# Altium PCB ControlBoard_v2.PcbDoc (part 1 of 2)
Units mm, origin at the board's own origin, x right, y up, seen from the top; angles counter-clockwise.
Board outline 155.45 x 113.03 mm, 2 copper layers (Top Layer, Bottom Layer); 127 components, 106 nets, 627 pads, 129 vias.
Unrouted connection lines stored in the file: 132.
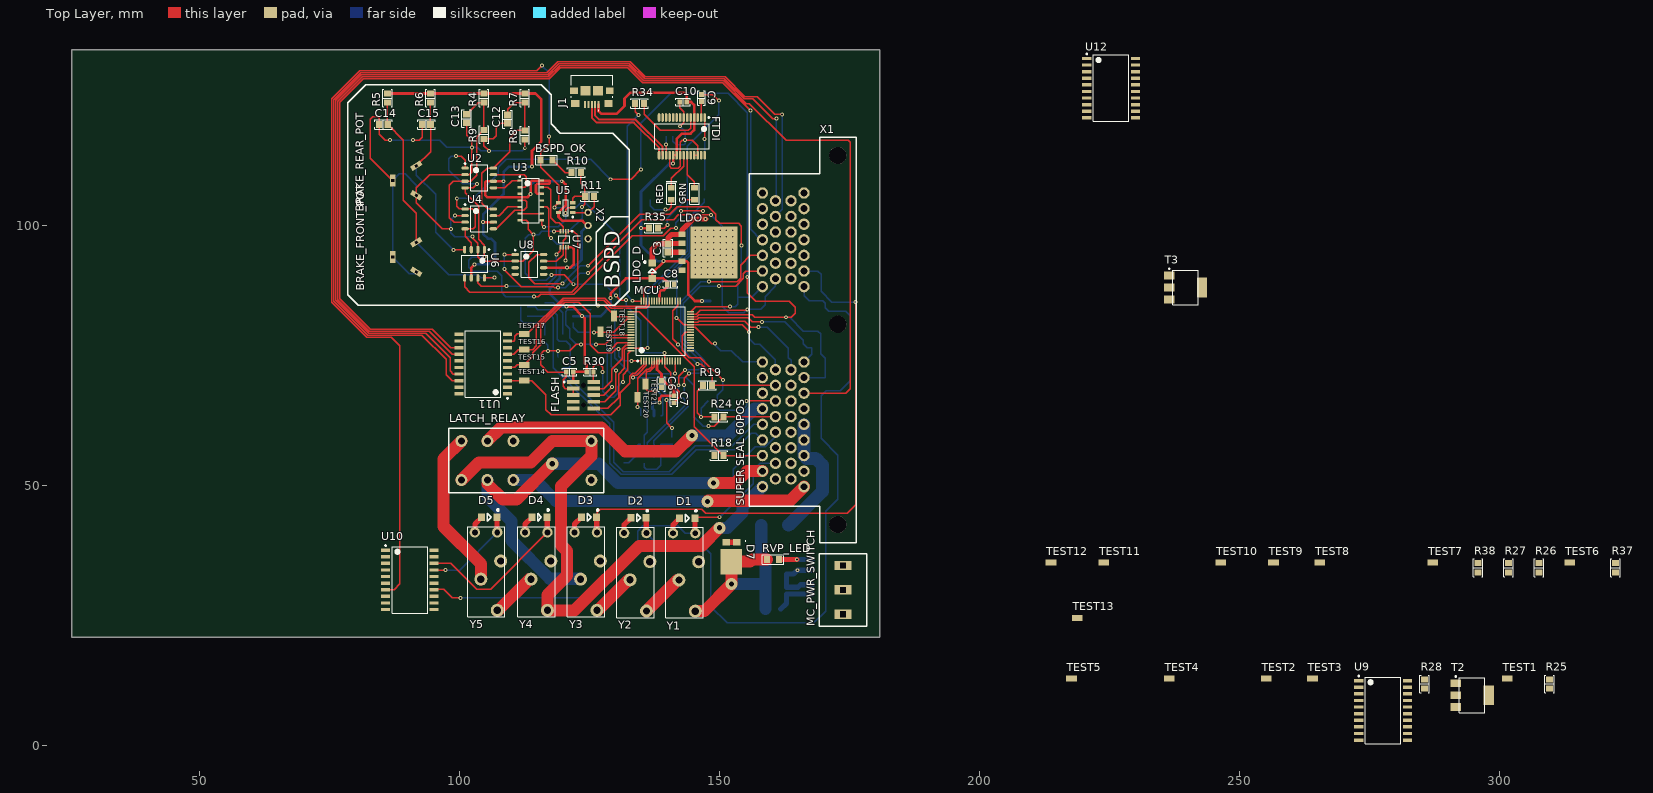
[diagram p0: Top Layer view]
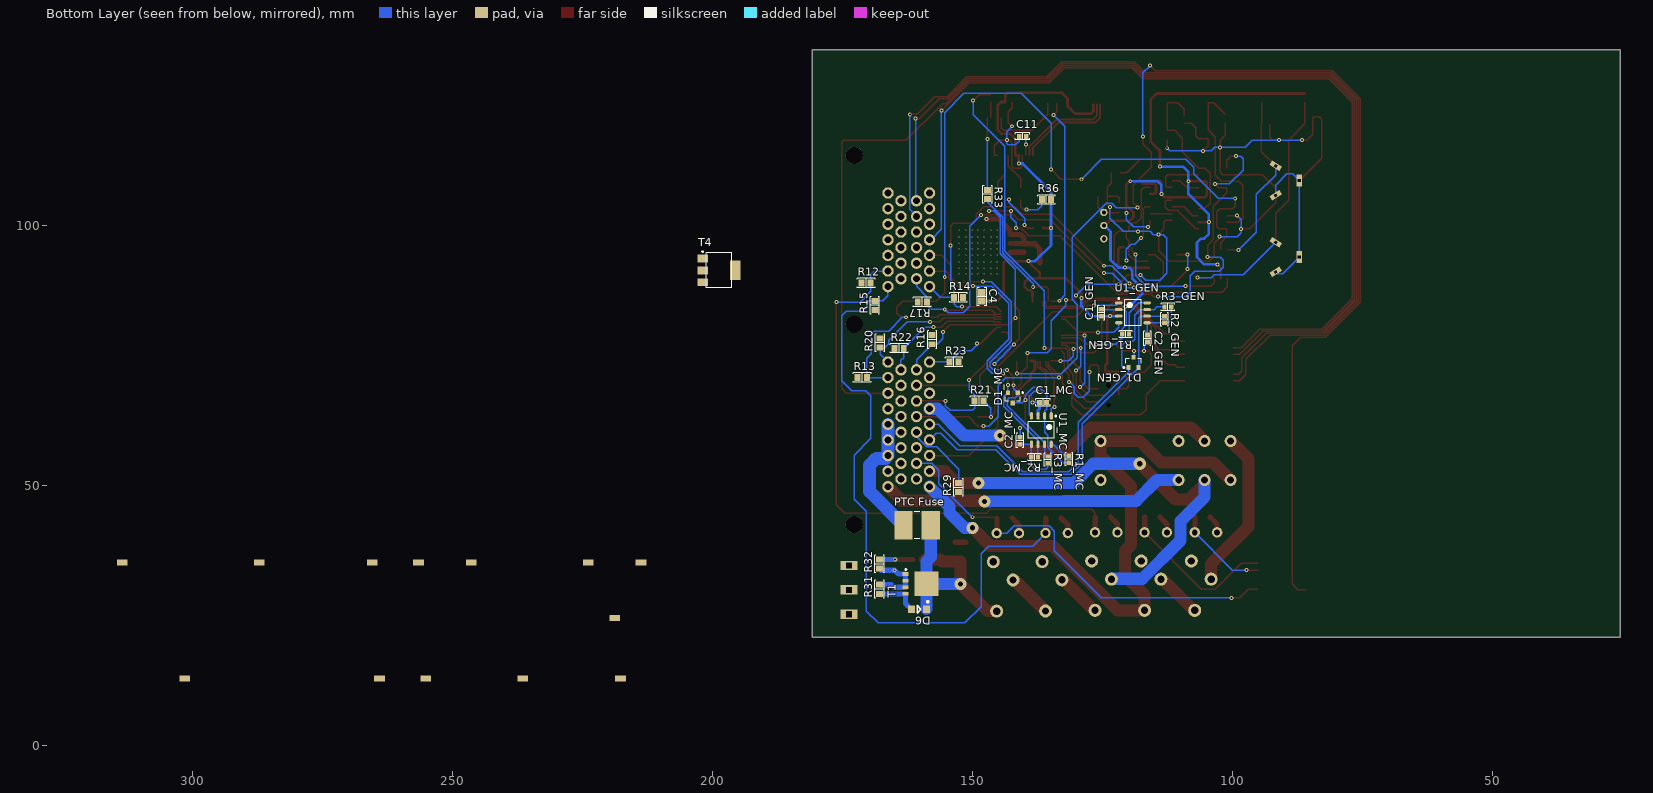
[diagram p1: Bottom Layer view, seen from below]

## Layer stack, top to bottom
Top Solder: solder mask 0.0102, Solder Resist, Dk 3.5
Top Layer: signal copper 0.0356
Dielectric 1: dielectric 0.32, FR-4, Dk 4.8
Bottom Layer: signal copper 0.0356
Bottom Solder: solder mask 0.0102, Solder Resist, Dk 3.5

## Board outline
25.4,20.701 180.848,20.701 180.848,133.731 25.4,133.731

## Design rules (kind name [scope] priority, off if disabled: settings)
Clearance [InNetClass('All Nets')] p1: gap=0.127 ignorepadtopadclearanceinfootprint=FALSE
DiffPairsRouting [All] p1: maxlimit=0.254 minlimit=0.254 mostfreqgap=0.254 toplayer_minwidth=0.381 toplayer_maxwidth=0.381 toplayer_prefwidth=0.381 bottomlayer_minwidth=0.381 bottomlayer_maxwidth=0.381 bottomlayer_prefwidth=0.381 maxuncoupledlength=12.7
FabricationTestPointUsage TestPointUsage [All] p1: valid=0 allowmultiple=FALSE
FabricationTestpoint Testpoint [All] p1: side=3 testpointundercomponent=TRUE minsize=1.016 maxsize=2.54 preferedsize=1.524 minholesize=0.508 maxholesize=1.016 preferedholesize=0.813 testpointgrid=0.025 allowsidetop=TRUE allowsidebottom=TRUE usegrid=TRUE gridtolerance=0
HoleSize [All] p1: absolutevalues=TRUE maxlimit=6.274 minlimit=0.254 maxpercent=80.000 minpercent=20.000
PasteMaskExpansion PasteMaskExpansion_1 [InComponent('P1')] p1: expansion=-3.81
PasteMaskExpansion [All] p2: expansion=0
PlaneClearance [All] p1: clearance=0.254
PlaneConnect [All] p1: planeconnectstyle=Relief reliefexpansion=0.381 reliefentries=4 reliefconductorwidth=0.254 reliefairgap=0.254
PolygonConnect [All] p1: connectstyle=Relief reliefconductorwidth=0.254 reliefentries=4 polygonreliefangle="90 Angle" airgapwidth=0.254
RoutingVias [All] p1: holewidth=0.381 width=0.762 viastyle="Through Hole" minholewidth=0.254 minwidth=0.508 maxholewidth=1 maxwidth=2.35
SilkToSolderMaskClearance SilkscreenOverComponentPads [IsPad] p1: minsilkscreentomaskgap=0.254 clearancetoexposedcopper=TRUE
SolderMaskExpansion [All] p1: expansion=0.127
UnRoutedNet [All] p1: checkbadconnections=TRUE
Width [All] p1: maxlimit=3.81 minlimit=0.254 preferedwidth=0.254 minimp=50.000000 maximp=50.000000 favimp=50.000000
21 further rules are at their usual default settings.

## Classes and differential pairs
channel class CAN_Tranceiver: GEN MC
component class USB: C9 C10 C11 FTDI GRN J1 R33 R34 R35 R36 RED
component class SHUTDOWN: D1 D2 D3 D4 D5 LATCH_RELAY Y1 Y2 Y3 Y4 Y5
component class RVP_OVP: D6 D7 "PTC Fuse" R31 R32 RVP_LED T1
component class MCU: C5 C6 C7 C8 FLASH MCU R30 TEST18 TEST19 TEST20 TEST21
component class MC: C1_MC C2_MC D1_MC R1_MC R2_MC R3_MC U1_MC
component class MC_PWR_ENABLE: R29
component class LDO_5V: C3 C4 LDO LDO_D
component class GEN: C1_GEN C2_GEN D1_GEN R1_GEN R2_GEN R3_GEN U1_GEN
component class DRIVERS: R25 R26 R27 R28 R37 R38 T2 T3 T4 TEST1 TEST2 TEST3 TEST4 TEST5 TEST6 TEST7 TEST8 TEST9 TEST10 TEST11 TEST12 TEST13 TEST14 TEST15 TEST16 TEST17 U9 U10 U11 U12
component class CONNECTOR: R12 R13 R14 R15 R16 R17 R18 R19 R20 R21 R22 R23 R24
component class BSPD: BRAKE_FRONT_POT BRAKE_REAR_POT BSPD_OK C12 C13 C14 C15 R4 R5 R6 R7 R8 R9 R10 R11 U2 U3 U4 U5 U6 U7 U8 X2
differential pair D: +D_P -D_N

## Components (designator, comment, footprint, x,y, rotation, side; value= is the part's Value field where it differs from the comment)
BRAKE_FRONT_POT "RV6LAYSA502A" RV6LAYSA502A 88.798,93.853 r90 top value="100-5M Ohms"
BRAKE_REAR_POT "RV6LAYSA502A" RV6LAYSA502A 88.798,108.585 r90 top value="100-5M Ohms"
BSPD_OK "LED" 0805_LED 116.713,112.522 r0 top value=Green
C1_GEN "Capacitor MLCC 0.10uf 50V CAP 0603/1608" "CAP 0603/1608" 125.22,83.148 r270 bottom value=0.10uf (schematic designator C1)
C1_MC "Capacitor MLCC 0.10uf 50V CAP 0603/1608" "CAP 0603/1608" 136.412,65.913 r0 bottom value=0.10uf (schematic designator C1)
C2_GEN "Capacitor MLCC 4700pf 50V CAP 0603/1608" "CAP 0603/1608" 116.33,78.195 r90 bottom value=4700pf (schematic designator C2)
C2_MC "Capacitor MLCC 4700pf 50V CAP 0603/1608" "CAP 0603/1608" 140.831,58.547 r270 bottom value=4700pf (schematic designator C2)
C3 "Capacitor MLCC 0.22uf 50V CAP 0805/2012" "CAP 0805/2012" 140.081,95.631 r90 top value=0.22uf
C4 "Capacitor MLCC 0.10uf 50V CAP 0805/2012" "CAP 0805/2012" 148.187,86.233 r270 bottom value=0.10uf
C5 "Capacitor MLCC 0.10uf 16V CAP 0603/1608" "CAP 0603/1608" 121.158,71.755 r0 top value=0.10uf
C6 "Capacitor MLCC 0.10uf 25V CAP 0603/1608" "CAP 0603/1608" 138.811,69.469 r90 top value=0.10uf
C7 "Capacitor MLCC 0.10uf 25V CAP 0603/1608" "CAP 0603/1608" 141.224,66.548 r90 top value=0.10uf
C8 "Capacitor MLCC 100pf 25V CAP 0603/1608" "CAP 0603/1608" 140.589,88.646 r180 top value=100pf
C9 "Capacitor MLCC 0.10uf 25V CAP 0603/1608" "CAP 0603/1608" 146.5,124.46 r90 top value=0.10uf
C10 "Capacitor MLCC 0.10uf 25V CAP 0603/1608" "CAP 0603/1608" 143.002,123.698 r0 top value=0.10uf
C11 "Capacitor MLCC 0.10uf 25V CAP 0603/1608" "CAP 0603/1608" 140.335,117.094 r180 bottom value=0.10uf
C12 "Capacitor MLCC 0.10uf 16V CAP 0805/2012" "CAP 0805/2012" 109.22,120.396 r90 top value=0.10uf
C13 "Capacitor MLCC 0.10uf 16V CAP 0805/2012" "CAP 0805/2012" 101.346,120.523 r90 top value=0.10uf
C14 "Capacitor MLCC 0.10uf 16V CAP 0805/2012" "CAP 0805/2012" 85.344,119.38 r0 top value=0.10uf
C15 "Capacitor MLCC 0.10uf 16V CAP 0805/2012" "CAP 0805/2012" 93.599,119.38 r0 top value=0.10uf
D1 "DIODE" SOD123F 143.807,43.663 r0 top
D1_GEN "NUP1105LT1G" "SOT-23 (TO-236)" 118.997,73.623 r90 bottom value=TVS_24V (schematic designator D1)
D1_MC "NUP1105LT1G" "SOT-23 (TO-236)" 142.228,66.802 r270 bottom value=TVS_24V (schematic designator D1)
D2 "DIODE" SOD123F 134.409,43.688 r0 top
D3 "DIODE" SOD123F 124.884,43.815 r0 top
D4 "DIODE" SOD123F 115.359,43.815 r0 top
D5 "DIODE" SOD123F 105.707,43.815 r0 top
D6 "DDZ9701-7" SOD123F 160.274,26.162 r180 bottom value=14Vz
D7 "DIODE_2A1K" TO-277 152.273,36.219 r270 top value="20 A"
FLASH "CN-2P-M-R10" HDR2X5_SMT 123.825,67.31 r270 top value=CONN
FTDI "FT232RL" SSOP-28 142.748,117.094 r270 top
GRN "LED" 0805_LED 145.161,106.045 r90 top value=Green
J1 "USB-5-6SHLD" TECO-1981568-5_V 125.419,123.182 r180 top value=CONN
LATCH_RELAY "JW2SN-DC12V-Relay" JW2SN-DC12V-Relay 112.776,54.737 r0 top
LDO "BA50DD0WHFP-TR" HRP5 148.9,94.791 r270 top value=5V
LDO_D "DIODE" SOD123F 137.033,91.264 r90 top
MC_PWR_SWITCH "SPST" M2011SS1W01/UC 173.736,29.846 r180 top
MCU "MKE18F512 VLH16 MCU" TQFP64 138.684,79.629 r90 top
"PTC Fuse" "PTC Fuse" "PTC Fuse 2920/07351" 160.655,42.291 r180 bottom value="2A hold, 4A trip, 40A max"
R1_GEN "Resistor 100 0603 1/10W 10%" "RES 0603/1608" 120.521,79.036 r180 bottom value=100 (schematic designator R1)
R1_MC "Resistor 100 0603 1/10W 10%" "RES 0603/1608" 131.433,54.991 r90 bottom value=100 (schematic designator R1)
R2_GEN "Resistor 62 0603 1/10W 5%" "RES 0603/1608" 113.028,81.878 r270 bottom value=62 (schematic designator R2)
R2_MC "Resistor 62 0603 1/10W 5%" "RES 0603/1608" 138.037,55.372 r0 bottom value=62 (schematic designator R2)
R3_GEN "Resistor 62 0603 1/10W 5%" "RES 0603/1608" 112.393,84.291 r0 bottom value=62 (schematic designator R3)
R3_MC "Resistor 62 0603 1/10W 5%" "RES 0603/1608" 135.497,54.864 r90 bottom value=62 (schematic designator R3)
R4 "Resistor 2.0k 0805 1/4W 5%" "RES 0805/2012" 104.648,124.46 r90 top value=2.0k
R5 "Resistor 3.0k 0805 1/2W 5%" "RES 0805/2012" 86.106,124.46 r90 top value=3.0k
R6 "Resistor 3.0k 0805 1/2W 5%" "RES 0805/2012" 94.361,124.46 r90 top value=3.0k
R7 "Resistor 18k 0805 1/4W 5%" "RES 0805/2012" 112.522,124.46 r90 top value=18k
R8 "Resistor 2.0k 0805 1/4W 5%" "RES 0805/2012" 112.522,117.348 r90 top value=2.0k
R9 "Resistor 18k 0805 1/4W 5%" "RES 0805/2012" 104.648,117.475 r90 top value=18k
R10 "Resistor 240 0805 1/4W 1%" "RES 0805/2012" 122.428,110.109 r180 top value=240
R11 "Resistor 47k 0805 1/4W 1%" "RES 0805/2012" 124.968,105.537 r0 top value=47k
R12 "Resistor 47k 0805 1/10W 1%" "RES 0805/2012" 170.434,88.9 r0 bottom value=47k
R13 "Resistor 47k 0805 1/10W 5%" "RES 0805/2012" 171.196,70.691 r0 bottom value=47k
R14 "Resistor 47k 0805 1/10W 5%" "RES 0805/2012" 152.654,86.106 r0 bottom value=47k
R15 "Resistor 47k 0805 1/10W 1%" "RES 0805/2012" 168.783,84.582 r270 bottom value=47k
R16 "Resistor 47k 0805 1/10W 5%" "RES 0805/2012" 157.734,77.978 r90 bottom value=47k
R17 "Resistor 47k 0805 1/10W 5%" "RES 0805/2012" 159.639,85.217 r180 bottom value=47k
R18 "Resistor 47k 0805 1/10W 1%" "RES 0805/2012" 149.86,55.691 r180 top value=47k
R19 "Resistor 47k 0805 1/10W 5%" "RES 0805/2012" 147.701,69.215 r180 top value=47k
R20 "Resistor 47k 0805 1/10W 5%" "RES 0805/2012" 167.767,77.343 r270 bottom value=47k
R21 "Resistor 47k 0805 1/10W 5%" "RES 0805/2012" 148.717,66.191 r180 bottom value=47k
R22 "Resistor 47k 0805 1/10W 5%" "RES 0805/2012" 164.084,76.327 r180 bottom value=47k
R23 "Resistor 47k 0805 1/10W 5%" "RES 0805/2012" 153.543,73.691 r180 bottom value=47k
R24 "Resistor 47k 0805 1/10W 5%" "RES 0805/2012" 149.86,63.119 r180 top value=47k
R25 "Resistor 47k 0805 1/4W 5%" "RES 0805/2012" 309.635,11.755 r90 top value=47k
R26 "Resistor 47k 0805 1/4W 5%" "RES 0805/2012" 307.603,34.107 r90 top value=47k
R27 "Resistor 47k 0805 1/4W 5%" "RES 0805/2012" 301.761,34.107 r90 top value=47k
R28 "Resistor 47k 0805 1/4W 5%" "RES 0805/2012" 285.632,11.755 r90 top value=47k
R29 "Resistor 47k 0805 1/4W 10%" "RES 0805/2012" 152.654,49.53 r90 bottom value=47k
R30 "Resistor 10k 0603 1/10W 1%" "RES 0603/1608" 125.095,71.755 r180 top value=10k
R31 "Resistor 47k 0805 1/10W 1%" "RES 0805/2012" 167.894,29.972 r270 bottom value=47k
R32 "Resistor 470 0805 1/10W 1%" "RES 0805/2012" 167.88,34.798 r90 bottom value=470
R33 "Resistor 1.0k 0805 1/4W 1%" "RES 0805/2012" 147.066,105.918 r270 bottom value=1.0k
R34 "Resistor 1.0k 0805 1/4W 1%" "RES 0805/2012" 134.62,123.444 r180 top value=1.0k
R35 "Resistor 1.0k 0805 1/4W 1%" "RES 0805/2012" 137.287,99.441 r180 top value=1.0k
R36 "Resistor 1.0k 0805 1/4W 1%" "RES 0805/2012" 135.763,104.902 r180 bottom value=1.0k
R37 "Resistor 47k 0805 1/2W 5%" "RES 0805/2012" 322.335,34.107 r90 top value=47k
R38 "Resistor 47k 0805 1/2W 5%" "RES 0805/2012" 295.919,34.107 r90 top value=47k
RED "LED" 0805_LED 140.716,106.045 r90 top value=Red
RVP_LED "LED" 0805_LED 160.281,35.687 r0 top value=Green
T1 "PSMN2R2-25YLC 25V Logic Level MOSFET" LFPAK-SO8 160.147,30.988 r180 bottom value=N_Channel
T2 "STN1HNK60" SOT-223-3 294.776,9.596 r0 top
T3 "STN1HNK60" SOT-223-3 239.649,88.011 r0 top
T4 "STN1HNK60" SOT-223-3 198.755,91.313 r180 bottom
TEST1 "fan_pwm" RCU-0C#1 301.507,12.771 r90 top
TEST2 "imd_ok" RCU-0C#1 255.152,12.771 r90 top
TEST3 "fan_en" RCU-0C#1 264.042,12.771 r90 top
TEST4 "ts_live" RCU-0C#1 236.483,12.771 r90 top
TEST5 "bms_ok" RCU-0C#1 217.687,12.771 r90 top
TEST6 "ts_rdy_sen" RCU-0C#1 313.572,35.123 r90 top
TEST7 "ts_rdy" RCU-0C#1 287.156,35.123 r90 top
TEST8 "redun_1" RCU-0C#1 265.439,35.123 r90 top
TEST9 "redun_2" RCU-0C#1 256.549,35.123 r90 top
TEST10 "bspd_ok" RCU-0C#1 246.389,35.123 r90 top
TEST11 "brk_lit" RCU-0C#1 223.91,35.123 r90 top
TEST12 "air+" RCU-0C#1 213.75,35.123 r90 top
TEST13 "air-" RCU-0C#1 218.821,24.455 r90 top
TEST14 "prchrg" RCU-0C#2 112.399,70.099 r90 top
TEST15 "dschrg" RCU-0C#2 112.395,73.147 r90 top
TEST16 "rtds" RCU-0C#2 112.395,76.068 r90 top
TEST17 "dcdc_dis" RCU-0C#2 112.399,79.116 r90 top
TEST18 "can_tx_gen" RCU-0C#2 129.667,82.55 r0 top
TEST19 "can_rx_gen" RCU-0C#2 127.127,79.502 r180 top
TEST20 "can_tx_mc" RCU-0C#2 134.227,66.929 r0 top
TEST21 "can_rx_mc" RCU-0C#2 135.763,69.469 r0 top
U1_GEN "MCP2561 CAN Transceiver" SOIC-8 119.124,83.148 r180 bottom value=CAN/UART (schematic designator U1)
U1_MC "MCP2561 CAN Transceiver" SOIC-8 136.733,60.579 r270 bottom value=CAN/UART (schematic designator U1)
U2 "BF_RANGE" SOIC-8 103.759,109.093 r0 top
U3 "AND" SOT108-1 113.665,104.775 r0 top
U4 "BR_RANGE" SOIC-8 103.759,101.219 r0 top
U5 "OR_BYPASS" SOT23-5 120.392,103.378 r180 top
U6 "BF_BR" SOIC-8 102.87,92.583 r270 top
U7 "NAND" R-PDSO-G8 120.142,97.282 r270 top
U8 "C_CA" SOIC-8 113.411,92.456 r0 top
U9 "5V_OUT" PG-DSO-20 277.631,6.675 r0 top
U10 "12V_OUT_1" PG-DSO-20 90.424,31.781 r0 top
U11 "12V_OUT_2" PG-DSO-20 104.521,73.274 r180 top
U12 "PG-DSO-20" PG-DSO-20 225.298,126.365 r0 top
X1 "GENERAL" "SUPERSEAL 60POS 90Deg" 172.743,42.441 r90 top value=CONN
X2 "TEST" XG8V-0331 124.714,97.389 r90 top
Y1 "ACTP112" ACTP112 145.331,25.756 r90 top
Y2 "ACTP112" ACTP112 135.933,25.781 r90 top
Y3 "ACTP112" ACTP112 126.408,25.908 r90 top
Y4 "ACTP112" ACTP112 116.883,25.908 r90 top
Y5 "ACTP112" ACTP112 107.231,25.908 r90 top

## Footprints (in the part's own frame and the unit in brackets; to place one, negate y for a bottom-side part, rotate by r counter-clockwise, add the part's x,y. Pads: shape width x height; smd on the part's side, far side on the other; paste and mask are expansions set on the pad)
0805_LED [mm]
  rect 1.1x1.3 smd: 1(-1.15,0) 2(1.15,0)
  silkscreen extent -2.06,-0.89 2.03,0.89, body extent -1.05,-0.67 1.05,0.67, height 0.9
ACTP112 [mm] "ACTP112, 12V Relay"
  round 2 hole 1.1: COIL1(15,0) COIL2(15,4.3)
  round 2.5 hole 1.4: COM(0,0) NC(9.5,-0.65) NO(6,3.15)
  silkscreen extent -1.27,-1.49 16.13,5.72, body extent -1.27,-1.52 16.13,5.72, height 13.5
"CAP 0603/1608" [mm] "Chip Capacitor, 2-Leads, Body 1.60x0.80mm, IPC Medium Density"
  rect 0.9x1 smd: 1(-0.675,0) 2(0.675,0)
  silkscreen extent -1.4,-0.7 1.4,0.7, body extent -0.8,-0.41 0.8,0.41, height 0.82
"CAP 0805/2012" [mm] "Chip Capacitor, 2-Leads, Body 2.00x1.20mm, IPC Medium Density"
  rect 1.3x1.4 smd: 1(-0.8,0) 2(0.8,0)
  silkscreen extent -1.7,-0.9 1.7,0.9, body extent -1,-0.64 1,0.64, height 1.26
HDR2X5_SMT [mm] "Header, 10-Leads, Body 3.43x6.35mm, Pitch 1.27mm"
  rect 0.76x2.4 smd: 1(-2.54,-1.95) 2(-2.54,1.95) 3(-1.27,-1.95) 4(-1.27,1.95) 5(0,-1.95) 6(0,1.95) 7(1.27,-1.95) 8(1.27,1.95) 9(2.54,-1.95) 10(2.54,1.95)
  round 0 hole 1 unplated: MH1(-1.905,0) MH2(1.905,0)
  silkscreen extent -2.66,-3.82 -2.42,-3.57, body extent -3.18,-1.72 3.18,1.72, height 4.55
HRP5 [mm]
  rect 1.07x1.37 smd: 1(-3.44,-6.125) 2(-1.72,-6.125) 3(0,-6.125) 4(1.72,-6.125) 5(3.44,-6.125)
  rect 10x9 smd: 6(0,0)
  round 0.3 hole 0.3: hole(-4.2,2.4) hole(-4.2,3.6) hole(-4.2,-1.2) hole(-4.2,0) hole(-4.2,1.2) hole(-4.2,-3.6) hole(-4.2,-2.4) hole(-3,3.6) hole(-3,1.2) hole(-3,2.4) hole(-3,0) hole(-3,-2.4) hole(-3,-1.2) hole(-3,-3.6) hole(-1.8,3.6) hole(-1.8,1.2) hole(-1.8,2.4) hole(-1.8,0) hole(-1.8,-2.4) hole(-1.8,-1.2) hole(-1.8,-3.6) hole(-0.6,3.6) hole(-0.6,2.4) hole(-0.6,1.2) hole(-0.6,0) hole(-0.6,-1.2) hole(-0.6,-2.4) hole(-0.6,-3.6) hole(0.6,3.6) hole(0.6,2.4) hole(0.6,1.2) hole(0.6,0) hole(0.6,-1.2) hole(0.6,-2.4) hole(0.6,-3.6) hole(1.8,3.6) hole(1.8,1.2) hole(1.8,2.4) hole(1.8,0) hole(1.8,-2.4) hole(1.8,-1.2) hole(1.8,-3.6) hole(3,3.6) hole(3,1.2) hole(3,2.4) hole(3,0) hole(3,-2.4) hole(3,-1.2) hole(3,-3.6) hole(4.2,2.4) hole(4.2,3.6) hole(4.2,-1.2) hole(4.2,0) hole(4.2,1.2) hole(4.2,-3.6) hole(4.2,-2.4)
  body extent -4.75,-4.44 4.7,4.45, height 1.9
JW2SN-DC12V-Relay [mm] "JW2SN-DC12V"
  round 2.3 hole 1.3: 1(12.554,-3.75) 2(-2.446,-3.75) 3(-7.446,-3.75) 4(-12.446,-3.75) 5(-12.446,3.75) 6(-7.446,3.75) 7(-2.446,3.75) 8(12.554,3.75)
  silkscreen extent -14.86,-6.16 14.97,6.16, body extent -14.73,-6.1 14.86,6.1, height 20
LFPAK-SO8 [mm] "TO, 5-Pads, Body 5.15x5.86mm (max), IPC Low Density"
  rect 1.15x0.7 smd: 1(-2.7,1.905) 2(-2.7,0.635) 3(-2.7,-0.635) 4(-2.7,-1.905)
  rect 4.6x4.7 smd: mb(1.3,0)
  silkscreen extent -2.78,2.66 -2.53,2.9, body extent -2.95,-2.5 3.05,2.5, height 1.25
M2011SS1W01/UC [mm]
  rect 3.25x1.8 hole 1.1 square: 1(0,-4.7) 2(0,0) 3(0,4.7)
  Top Layer keep-out lines w0.254: -4.5,-7 -4.5,-7
  silkscreen extent -4.6,-7 4.6,7
PG-DSO-20 [mm] "PG-DSO-20, 20-Leads, Body 12.70x7.50mm, Pitch 1.27mm, IPC Medium Density, BTS716G"
  rect 1.75x0.65 smd: 1(-4.675,5.715) 2(-4.675,4.445) 3(-4.675,3.175) 4(-4.675,1.905) 5(-4.675,0.635) 6(-4.675,-0.635) 7(-4.675,-1.905) 8(-4.675,-3.175) 9(-4.675,-4.445) 10(-4.675,-5.715) 11(4.675,-5.715) 12(4.675,-4.445) 13(4.675,-3.175) 14(4.675,-1.905) 15(4.675,-0.635) 16(4.675,0.635) 17(4.675,1.905) 18(4.675,3.175) 19(4.675,4.445) 20(4.675,5.715)
  silkscreen extent -4.8,-6.4 3.4,6.71, body extent -3.8,-6.4 3.8,6.4, height 2.65
"PTC Fuse 2920/07351" [mm] "Chip PTC Fuse, 2-Leads, Body 7.36x5.12mm, IPC Medium Density"
  rect 3.5x5.45 smd: 1(-2.625,0) 2(2.625,0)
  silkscreen extent -0.5,-2.62 0.5,2.63, body extent -3.99,-2.72 3.99,2.72, height 1.25
R-PDSO-G8 [mm] "TSSOP, 8-Leads, Body 2.00x2.30mm, Pitch 0.50mm, IPC Medium Density SN74LVC2G132"
  rect 0.9x0.3 smd: 1(-1.55,0.75) 2(-1.55,0.25) 3(-1.55,-0.25) 4(-1.55,-0.75) 5(1.55,-0.75) 6(1.55,-0.25) 7(1.55,0.25) 8(1.55,0.75)
  silkscreen extent -1.67,-1.05 0.7,1.58, body extent -1.1,-1.05 1.1,1.05, height 0.9
RCU-0C#1 [mm]
  rect 1.15x2.05 all layers, no hole: 1(0,0)
RCU-0C#2 [mm]
  rect 1.15x2.05 smd: 1(0,0)
"RES 0603/1608" [mm] "Chip Resistor, 2-Leads, Body 1.60x0.80mm, IPC Medium Density"
  rect 0.85x0.95 smd: 1(-0.65,0) 2(0.65,0)
  silkscreen extent -1.27,-0.7 1.27,0.7, body extent -0.8,-0.4 0.8,0.4, height 0.45
"RES 0805/2012" [mm] "Chip Resistor, 2-Leads, Body 2.00x1.25mm, IPC Medium Density"
  rect 1.15x1.35 smd: 1(-0.875,0) 2(0.875,0)
  silkscreen extent -1.7,-0.9 1.7,0.9, body extent -0.95,-0.62 1.05,0.63, height 0.6
RV6LAYSA502A [mil] "5k Potentiometer"
  rect 90x40 hole 20 square rot 122: 1(111.81,-112.94)
  rect 90x40 hole 20 square: 2(0,66)
  rect 90x40 hole 20 square rot 58: 3(-111.81,-112.94)
SOD123F [mm] "SODFL, 2-Leads, Body 1.80x3.50mm, IPC Low Density"
  rect 1.35x1.45 smd: 1(-1.475,0) 2(1.475,0)
  silkscreen extent -0.38,-0.76 1.75,1.5, body extent -1.75,-0.95 1.75,0.95, height 1.15
SOIC-8 [mm] "SOIC, 8-Leads, Body 4.90x3.90mm, Pitch 1.27mm, IPC Medium Density"
  oval 1.45x0.6 smd: 1(-2.725,1.905) 2(-2.725,0.635) 3(-2.725,-0.635) 4(-2.725,-1.905) 5(2.725,-1.905) 6(2.725,-0.635) 7(2.725,0.635) 8(2.725,1.905)
  silkscreen extent -2.85,-2.5 1.6,2.88, body extent -3,-2.5 3,2.5, height 1.75
SOT23-5 [mm] "SOT23, 5-Leads, Body 2.90x2.80mm, Pitch 0.95mm, IPC Medium Density, LP5907-3.3"
  rect 1x0.6 smd: 1(-1.375,0.95) 2(-1.375,0) 3(-1.375,-0.95) 4(1.375,-0.95) 5(1.375,0.95)
  silkscreen extent -1.5,-1.55 0.5,1.92, body extent -0.88,-1.52 0.87,1.53, height 1.45
SOT108-1 [mm] "SOP, 14-Leads, Body 8.65x3.90mm, Pitch 1.27mm, IPC Medium Density, 74HC21"
  rect 0.889x0.42 smd: 1(-2.105,3.81) 2(-2.105,2.54) 3(-2.105,1.27) 4(-2.105,0) 5(-2.105,-1.27) 6(-2.105,-2.54) 7(-2.105,-3.81) 8(2.105,-3.81) 9(2.105,-2.54) 10(2.105,-1.27) 11(2.105,0) 12(2.105,1.27) 13(2.105,2.54) 14(2.105,3.81)
  silkscreen extent -2.23,-4.3 1.6,4.69, body extent -2,-4.3 2,4.3, height 1.75
"SOT-23 (TO-236)" [mm]
  rect 0.9x0.8 smd: 1(-1,0.95) 2(-1,-0.95) 3(1,0)
  silkscreen extent -1.12,-1.46 0.65,2.03, body extent -0.65,-1.46 0.65,1.46, height 1.11
SOT-223-3 [mm] "SOT223127P600-8N, NCP1117STAT3G, MMBT4403-7-F"
  rect 2x1.5 smd: 1(-3.15,2.3) 2(-3.15,0) 3(-3.15,-2.3)
  rect 2x3.8 smd: THM(3.15,0)
  silkscreen extent -3.27,-3.35 2.45,3.72, body extent -1.85,-3.35 1.85,3.35, height 1.8
SSOP-28 [mm] "SOP68P780X200-28N ,SOP, 28-Leads, Body 10.20x5.30mm, Pitch 0.68mm, IPC Medium Density, FT232RL"
  oval 1.65x0.5 smd: 1(-3.625,4.394) 2(-3.625,3.718) 3(-3.625,3.042) 4(-3.625,2.366) 5(-3.625,1.69) 6(-3.625,1.014) 7(-3.625,0.338) 8(-3.625,-0.338) 9(-3.625,-1.014) 10(-3.625,-1.69) 11(-3.625,-2.366) 12(-3.625,-3.042) 13(-3.625,-3.718) 14(-3.625,-4.394) 15(3.625,-4.394) 16(3.625,-3.718) 17(3.625,-3.042) 18(3.625,-2.366) 19(3.625,-1.69) 20(3.625,-1.014) 21(3.625,-0.338) 22(3.625,0.338) 23(3.625,1.014) 24(3.625,1.69) 25(3.625,2.366) 26(3.625,3.042) 27(3.625,3.718) 28(3.625,4.394)
  silkscreen extent -3.75,-5.25 2.4,5.32, body extent -2.8,-5.25 2.8,5.25, height 2
"SUPERSEAL 60POS 90Deg" [mm]
  round 2.2 hole 1.3: A1(7.25,14.5) A2(10.25,14.5) A3(13.25,14.5) A4(16.25,14.5) A5(19.25,14.5) A6(22.25,14.5) A7(25.25,14.5) A8(28.25,14.5) A9(31.25,14.5) A10(8.75,12) A11(11.75,12) A12(14.75,12) A13(17.75,12) A14(20.75,12) A15(23.75,12) A16(26.75,12) A17(29.75,12) A18(8.75,9) A19(11.75,9) A20(14.75,9) A21(17.75,9) A22(20.75,9) A23(23.75,9) A24(26.75,9) A25(29.75,9) A26(7.25,6.5) A27(10.25,6.5) A28(13.25,6.5) A29(16.25,6.5) A30(19.25,6.5) A31(22.25,6.5) A32(25.25,6.5) A33(28.25,6.5) A34(31.25,6.5) B1(45.75,14.5) B2(48.75,14.5) B3(51.75,14.5) B4(54.75,14.5) B5(57.75,14.5) B6(60.75,14.5) B7(63.75,14.5) B8(47.25,12) B9(50.25,12) B10(53.25,12) B11(56.25,12) B12(59.25,12) B13(62.25,12) B14(47.25,9) B15(50.25,9) B16(53.25,9) B17(56.25,9) B18(59.25,9) B19(62.25,9) B20(45.75,6.5) B21(48.75,6.5) B22(51.75,6.5) B23(54.75,6.5) B24(57.75,6.5) B25(60.75,6.5) B26(63.75,6.5)
  round 3.3 hole 3.3: CH(38.5,0) LH(0,0) RH(71,0)
  silkscreen extent -3.5,-3.5 74.5,17, body extent -3.5,-19.5 74.5,17, height 28.15
TECO-1981568-5_V [mm] "SMD, 5-Leads, Body 8x5.9mm, Pitch 0.65mm"
  rect 0.4x1.35 smd: 1(-1.3,0) 2(-0.65,0) 3(0,0) 4(0.65,0) 5(1.3,0)
  rect 1.6x1.4 smd: 6(-3.2,-0.225) 7(3.2,-0.225)
  rect 1.45x1.3 smd: 8(-3.425,-2.675) 9(3.425,-2.675)
  rect 1.9x1.9 smd: 10(-1.2,-2.675) 11(1.2,-2.675)
  silkscreen extent -4,-5.63 4,1.12, body extent -4,-5.63 4,0.28, height 3
TO-277 [mm] "DFN, 3-Leads, Body 4.44x5.91mm, Pitch 3.68mm, IPC Medium Density, FSV20100V"
  rect 1.3x1.45 smd: 1(-2.794,1.016) 2(-2.794,-1.016)
  rect 4.9x4.15 smd: 3(0.913,0)
  silkscreen extent -3.12,2.67 -3.03,2.77, body extent -3.3,-2.31 3.56,2.32, height 1.2
TQFP64 [mm] "TSQFP, 64-Leads, Body 10.00x10.00mm, Pitch 0.50mm, IPC Medium Density, MKE18F512VLH16"
  rect 1.35x0.3 smd: 1(-5.75,3.75) 2(-5.75,3.25) 3(-5.75,2.75) 4(-5.75,2.25) 5(-5.75,1.75) 6(-5.75,1.25) 7(-5.75,0.75) 8(-5.75,0.25) 9(-5.75,-0.25) 10(-5.75,-0.75) 11(-5.75,-1.25) 12(-5.75,-1.75) 13(-5.75,-2.25) 14(-5.75,-2.75) 15(-5.75,-3.25) 16(-5.75,-3.75) 33(5.75,-3.75) 34(5.75,-3.25) 35(5.75,-2.75) 36(5.75,-2.25) 37(5.75,-1.75) 38(5.75,-1.25) 39(5.75,-0.75) 40(5.75,-0.25) 41(5.75,0.25) 42(5.75,0.75) 43(5.75,1.25) 44(5.75,1.75) 45(5.75,2.25) 46(5.75,2.75) 47(5.75,3.25) 48(5.75,3.75)
  rect 0.3x1.35 smd: 17(-3.75,-5.75) 18(-3.25,-5.75) 19(-2.75,-5.75) 20(-2.25,-5.75) 21(-1.75,-5.75) 22(-1.25,-5.75) 23(-0.75,-5.75) 24(-0.25,-5.75) 25(0.25,-5.75) 26(0.75,-5.75) 27(1.25,-5.75) 28(1.75,-5.75) 29(2.25,-5.75) 30(2.75,-5.75) 31(3.25,-5.75) 32(3.75,-5.75) 49(3.75,5.75) 50(3.25,5.75) 51(2.75,5.75) 52(2.25,5.75) 53(1.75,5.75) 54(1.25,5.75) 55(0.75,5.75) 56(0.25,5.75) 57(-0.25,5.75) 58(-0.75,5.75) 59(-1.25,5.75) 60(-1.75,5.75) 61(-2.25,5.75) 62(-2.75,5.75) 63(-3.25,5.75) 64(-3.75,5.75)
  silkscreen extent -5.87,-4.67 4.67,4.68, body extent -5,-5 5,5, height 1.6
XG8V-0331 [mm] "3 pin header"
  round 1.4 hole 0.8: 1(0,0) 2(2.54,0) 3(5.08,0)

## Part data
BRAKE_FRONT_POT BRAKE_REAR_POT MCU RED: library part 1, Drawer_id=1, Manufacturer_id=1
  BRAKE_FRONT_POT BRAKE_REAR_POT: ComponentLink1Description=Datasheet, idTable=1, Link=https://www.digikey.com/product-detail/en/precision-electronics-corporation/RV6LAYSA502A/RV6L502C-ND/222820, Name=RV6LAYSA502A_rotary_pot
  MCU: idMCU=1, Name="MKE18F512VLH16 MCU"
  RED: idLED=1, Name=LED_0805_RED, Vf=0.7V
BSPD_OK GRN LATCH_RELAY T2 T3 T4: library part 2, Manufacturer_id=1, Drawer_id=1
  BSPD_OK GRN: Brightness=35mcd, Id=20mA, idLED=2, Name=LED_0805_GREEN, Vf=2V
  LATCH_RELAY: idRelay=2, Name="Relay JW2SN-DC12"
  T2 T3 T4: Id=0.4A, idFETs=2, Link=https://www.mouser.com/ProductDetail/STMicroelectronics/STN1HNK60?qs=sGAEpiMZZMshyDBzk1%2fWi4oKp8O9xu5UHBm4zQPzbqo%3d, MfrPartNo=STN1HNK60, Name=STN1HNK60_NMOSFET, Rds_On=8Ohms, Vgs(Max)=3.7V, Vgs(typ)=3V
C1_GEN C1_MC: library part 943, Dielectric=Ceramic, Manufacturer_id=1, Package="CAP 0603/1608", Voltage_Rating=50V, Created_By="Nick Mah", Created_Date=10/20/2018, Drawer_id=1, idCapacitor=943, Name="Cap_0.10uf_50V_CAP 0603/1608"
C2_GEN C2_MC: library part 929, Dielectric=Ceramic, Manufacturer_id=1, Package="CAP 0603/1608", Voltage_Rating=50V, Created_By="Nick Mah", Created_Date=10/20/2018, Drawer_id=1, idCapacitor=929, Name="Cap_4700pf_50V_CAP 0603/1608"
C3: library part 1065, Dielectric=Ceramic, Manufacturer_id=1, Package="CAP 0805/2012", Voltage_Rating=50V, Created_By="Nick Mah", Created_Date=10/20/2018, Drawer_id=1, idCapacitor=1065, Name="Cap_0.22uf_50V_CAP 0805/2012"
C4: library part 1063, Dielectric=Ceramic, Manufacturer_id=1, Package="CAP 0805/2012", Voltage_Rating=50V, Created_By="Nick Mah", Created_Date=10/20/2018, Drawer_id=1, idCapacitor=1063, Name="Cap_0.10uf_50V_CAP 0805/2012"
C5: library part 223, Dielectric=Ceramic, Manufacturer_id=1, Package="CAP 0603/1608", Voltage_Rating=16V, Created_By="Nick Mah", Created_Date=10/20/2018, Drawer_id=1, idCapacitor=223, Name="Cap_0.10uf_16V_CAP 0603/1608"
C6 C7 C9 C10 C11: library part 583, Dielectric=Ceramic, Manufacturer_id=1, Package="CAP 0603/1608", Voltage_Rating=25V, Created_By="Nick Mah", Created_Date=10/20/2018, Drawer_id=1, idCapacitor=583, Name="Cap_0.10uf_25V_CAP 0603/1608"
C8: library part 529, Dielectric=Ceramic, Manufacturer_id=1, Package="CAP 0603/1608", Voltage_Rating=25V, Created_By="Nick Mah", Created_Date=10/20/2018, Drawer_id=1, idCapacitor=529, Name="Cap_100pf_25V_CAP 0603/1608"
C12 C13 C14 C15: library part 343, Dielectric=Ceramic, Manufacturer_id=1, Package="CAP 0805/2012", Voltage_Rating=16V, Created_By="Nick Mah", Created_Date=10/20/2018, Drawer_id=1, idCapacitor=343, Name="Cap_0.10uf_16V_CAP 0805/2012"
D1 D2 D3 D4 D5 LDO_D: library part 9, idDiode=9
D1_GEN D1_MC: library part 7, "ESD Protection Diode", Manufacturer_id=1, Package=SOT-23, Power=350W, Supplier1PartNo=NUP1105LT1GOSCT-ND, ComponentLink1URL=https://www.digikey.com/product-detail/en/on-semiconductor/NUP1105LT1G/NUP1105LT1GOSCT-ND/2122067, Drawer_id=1, Ic=8A, idDiode=7, Link=https://www.digikey.com/product-detail/en/on-semiconductor/NUP1105LT1G/NUP1105LT1GOSCT-ND/2122067, MfrPartNo=NUP1105LT1G, Name=SOT-23_350W_Zener, Num_Circuits=1, Supplier1=Digikey, Type=Zener
D6: library part 10, "Zener Diode 14V 500mW �}5% Surface Mount SOD-123", Manufacturer_id=8, Package=SOD-123, Power=500mW, Supplier1PartNo=DDZ9701-7DICT-ND, ComponentLink1Description=Datasheet, ComponentLink1URL=https://www.diodes.com/assets/Datasheets/ds30410.pdf, Drawer_id=1, idDiode=10, Link=https://www.digikey.com/product-detail/en/diodes-incorporated/DDZ9701-7/DDZ9701-7DICT-ND/3877402, MfrPartNo=DDZ9701-7, Name=DDZ9701, Num_Circuits=1, Supplier1=Digi-Key, Type=Zener
D7: library part 11, Manufacturer_id=1, MfrPartNo=FSV20100V, Package=TO-277, Supplier1PartNo=FSV20100VCT-ND, ComponentLink1Description=Datasheet, ComponentLink1URL=https://www.fairchildsemi.com/datasheets/FS/FSV20100V.pdf, Drawer_id=1, idDiode=11, Link=https://www.digikey.com/product-detail/en/on-semiconductor/FSV20100V/FSV20100VCT-ND/5306682, Name=FSV20100V, Type=Schottky
FLASH: library part 4, "2 row connector", Manufacturer_id=1, MfrPartNo=5103309-1, Voltage_Rating=None, ComponentLink1Description=Datasheet, Created_By=Aiku, Drawer_id=1, idConn=4, Link=https://www.digikey.com/product-detail/en/5103309-1/A33160-ND/1114898?utm_campaign=buynow&WT.z_cid=ref_octopart_dkc_buynow&utm_medium=aggregator&curr=usd&site=us&utm_source=octopart, Name=CONN_TE_2X5POS, Num_Contacts=10, Num_Rows=2, Pitch=2.54mm
FTDI: library part 3, Manufacturer_id=1, Created_By=Kyle, Drawer_id=1, idIC_Interface=3, Link=https://www.digikey.com/product-detail/en/ftdi-future-technology-devices-international-ltd/FT232RL-REEL/768-1007-1-ND/1836402, MfrPartNo=FT232RL, Name="USB FTDI", Protocol=UART, Vin(Max)=5.25, Vin(Min)=3.3
J1: library part 5, "USB Micro Type B", Manufacturer_id=1, MfrPartNo=1981568-1, ComponentLink1Description=Datasheet, Created_By=Aiku, Created_Date=10/20/2018, Drawer_id=1, idConn=5, Link=https://www.mouser.com/ProductDetail/TE-Connectivity-AMP/1981568-1?qs=sGAEpiMZZMulM8LPOQ%252bykzEIUPbUCiSfqsfxH3Oq%252bYo%3d, Name="TE USB Micro", Num_Contacts=5, Supplier1=TE
LDO: library part 6, Current_Rating=2A, Dropout_Voltage=0.7V, Manufacturer_id=1, Drawer_id=1, idPMIC_Lin=6, Link=https://www.mouser.com/ProductDetail/ROHM-Semiconductor/BA50DD0WHFP-TR?qs=4kLU8WoGk0sFpKnESpdNFg%3D%3D, Name="BA50DD0WHFP-TR Linear Voltage Regulator 5", Vin(Max)=33V, Vin(Min)=3V, Vout(Max)=5V
MC_PWR_SWITCH: library part 4, Manufacturer_id=1, MfrPartNo=M2011SS1W01_UC, Voltage_Rating="125 V", ComponentLink1Description=Datasheet, ComponentLink1URL=https://www.nkkswitches.com/pdf/MtogglesBushing.pdf, Drawer_id=1, idTable=4, Link=https://www.digikey.com/product-detail/en/nkk-switches/M2011SS1W01-UC/360-3289-ND/2105194, Name=M2011SS1W01_UC_SPST_Switch
"PTC Fuse": library part 4, "Fuse", Manufacturer_id=1, MfrPartNo=2920L200, Created_By="Eunice Bernardo", Created_Date=10/27/2018, Drawer_id=1, I-hold=F?, I_hold=2A, I_max=40A, I_trip=4A, idFuse=4, LatestRevisionDate=17-Jul-2002, LatestRevisionNote="Re-released for DXP Platform.", Link=https://www.digikey.com/product-detail/en/littelfuse-inc/2920L200-24DR/F2872TR-ND/1211346, Name="PTC Poly Fuse Resettable", PackageDescription="Thru-Hole; 2 Leads", PackageReference=PIN-W2/E2.8, Published=8-Jun-2000, Publisher="Altium Limited"
R1_GEN R1_MC: library part 2293, Manufacturer_id=1, Package=0603, Power=1/10W, Tolerance=10%, ComponentLink1Description=Datasheet, Created_By="Nick Mah", Created_Date=2018-10-20, Drawer_id=1, idResistor=2293, Name=Res_100_0603_1/10W_10%, Supplier 1=Digi-Key
R2_GEN R2_MC R3_GEN R3_MC: library part 1340, Manufacturer_id=1, Package=0603, Power=1/10W, Tolerance=5%, ComponentLink1Description=Datasheet, Created_By="Nick Mah", Created_Date=2018-10-20, Drawer_id=1, idResistor=1340, Name=Res_62_0603_1/10W_5%, Supplier 1=Digi-Key
R4 R8: library part 1808, Manufacturer_id=1, Package=0805, Power=1/4W, Tolerance=5%, ComponentLink1Description=Datasheet, Created_By="Nick Mah", Created_Date=2018-10-20, Drawer_id=1, idResistor=1808, Name=Res_2.0k_0805_1/4W_5%, Supplier 1=Digi-Key
R5 R6: library part 2028, Manufacturer_id=1, Package=0805, Power=1/2W, Tolerance=5%, ComponentLink1Description=Datasheet, Created_By="Nick Mah", Created_Date=2018-10-20, Drawer_id=1, idResistor=2028, Name=Res_3.0k_0805_1/2W_5%, Supplier 1=Digi-Key
R7 R9: library part 1831, Manufacturer_id=1, Package=0805, Power=1/4W, Tolerance=5%, ComponentLink1Description=Datasheet, Created_By="Nick Mah", Created_Date=2018-10-20, Drawer_id=1, idResistor=1831, Name=Res_18k_0805_1/4W_5%, Supplier 1=Digi-Key
R10: library part 706, Manufacturer_id=1, Package=0805, Power=1/4W, Tolerance=1%, ComponentLink1Description=Datasheet, Created_By="Nick Mah", Created_Date=2018-10-20, Drawer_id=1, idResistor=706, Name=Res_240_0805_1/4W_1%, Supplier 1=Digi-Key
R11: library part 761, Manufacturer_id=1, Package=0805, Power=1/4W, Tolerance=1%, ComponentLink1Description=Datasheet, Created_By="Nick Mah", Created_Date=2018-10-20, Drawer_id=1, idResistor=761, Name=Res_47k_0805_1/4W_1%, Supplier 1=Digi-Key
R12 R15 R18 R31: library part 545, Manufacturer_id=1, Package=0805, Power=1/10W, Tolerance=1%, ComponentLink1Description=Datasheet, Created_By="Nick Mah", Created_Date=2018-10-20, Drawer_id=1, idResistor=545, Name=Res_47k_0805_1/10W_1%, Supplier 1=Digi-Key
R13 R14 R16 R17 R19 R20 R21 R22 R23 R24: library part 1625, Manufacturer_id=1, Package=0805, Power=1/10W, Tolerance=5%, ComponentLink1Description=Datasheet, Created_By="Nick Mah", Created_Date=2018-10-20, Drawer_id=1, idResistor=1625, Name=Res_47k_0805_1/10W_5%, Supplier 1=Digi-Key
R25 R26 R27 R28: library part 1841, Manufacturer_id=1, Package=0805, Power=1/4W, Tolerance=5%, ComponentLink1Description=Datasheet, Created_By="Nick Mah", Created_Date=2018-10-20, Drawer_id=1, idResistor=1841, Name=Res_47k_0805_1/4W_5%, Supplier 1=Digi-Key
R29: library part 2541, Manufacturer_id=1, Package=0805, Power=1/4W, Tolerance=10%, ComponentLink1Description=Datasheet, Created_By="Nick Mah", Created_Date=2018-10-20, Drawer_id=1, idResistor=2541, Name=Res_47k_0805_1/4W_10%, Supplier 1=Digi-Key
R30: library part 313, Manufacturer_id=1, Package=0603, Power=1/10W, Tolerance=1%, ComponentLink1Description=Datasheet, Created_By="Nick Mah", Created_Date=2018-10-20, Drawer_id=1, idResistor=313, Name=Res_10k_0603_1/10W_1%, Supplier 1=Digi-Key
R32: library part 497, Manufacturer_id=1, Package=0805, Power=1/10W, Tolerance=1%, ComponentLink1Description=Datasheet, Created_By="Nick Mah", Created_Date=2018-10-20, Drawer_id=1, idResistor=497, Name=Res_470_0805_1/10W_1%, Supplier 1=Digi-Key
R33 R34 R35 R36: library part 721, Manufacturer_id=1, Package=0805, Power=1/4W, Tolerance=1%, ComponentLink1Description=Datasheet, Created_By="Nick Mah", Created_Date=2018-10-20, Drawer_id=1, idResistor=721, Name=Res_1.0k_0805_1/4W_1%, Supplier 1=Digi-Key
R37 R38: library part 2057, Manufacturer_id=1, Package=0805, Power=1/2W, Tolerance=5%, ComponentLink1Description=Datasheet, Created_By="Nick Mah", Created_Date=2018-10-20, Drawer_id=1, idResistor=2057, Name=Res_47k_0805_1/2W_5%, Supplier 1=Digi-Key
RVP_LED: library part 2, Manufacturer_id=1, Package=0805, Brightness=7mcd, Drawer_id=1, Id=20mA, idLED=2, Link=https://www.digikey.com/product-detail/en/visual-communications-company-vcc/CMD17-21VGD-TR8/L62505CT-ND/254936, Name=CMD17_0805_GREEN, Vf=2.1V
T1: library part 3, "N-Channel 25V 100A (Tc) 106W (Tc) Surface Mount LFPAK56, Power-SO8", Manufacturer_id=6, MfrPartNo=PSMN2R2-25YLC,115, Package=LFPAK-SO8, Supplier1PartNo=1727-5299-1-ND, ComponentLink1Description=Datasheet, ComponentLink1URL=https://assets.nexperia.com/documents/data-sheet/PSMN2R2-25YLC.pdf, Created_By=Nick, Drawer_id=1, Id=100A, idFETs=3, Link=https://www.digikey.com/product-detail/en/nexperia-usa-inc/PSMN2R2-25YLC115/1727-5299-1-ND/2674299, Name=PSMN2R2, Num_Circuits=1, Rds_On=2.5mOhm, Supplier1=Digi-Key, Vdss=25V, Vgs(Max)=20V, Vgs(typ)=10V
TEST1 TEST2 TEST3 TEST4 TEST5 TEST6 TEST7 TEST8 TEST9 TEST10 TEST11 TEST12 TEST13 TEST14 TEST15 TEST16 TEST17 TEST18 TEST19 TEST20 TEST21: library part 5, Manufacturer_id=1, MfrPartNo=RCU-0C, Package=0603, ComponentLink1Description=Datasheet, ComponentLink1URL=https://www.te.com/commerce/DocumentDelivery/DDEController?Action=srchrtrv&DocNm=1773266&DocType=DS&DocLang=English, Drawer_id=1, idTable=5, Link=https://www.digikey.com/product-detail/en/te-connectivity-amp-connectors/RCU-0C/A106145CT-ND/3477802, Name=RCU-0C_Test_Point
U1_GEN U1_MC: library part 5, Manufacturer_id=1, MfrPartNo=MCP2561, Package=SOIC-8, Created_By="Angel Delgado", Data_Rate=1Mbps, Drawer_id=1, idIC_Interface=5, Link=https://www.digikey.com/product-detail/en/microchip-technology/MCP2561T-E-SN/MCP2561T-E-SNCT-ND/5148846, Name="CAN Transceiver", Num_Circuits=1, Protocol=CAN, Type=Transceiver, Vin(Max)=5.5V, Vin(Min)=4.5V
U2 U4 U6 U8: library part 7, Manufacturer_id=1, Drawer_id=1, idIC_Misc=7, Name="LT1018 Dual Comparator"
U3: library part 15, idIC_Misc=15
U5: library part 14, Manufacturer_id=1, Drawer_id=1, idIC_Misc=14, Name=SN74LVC1G32_2_input_OR_GATE
U7: library part 12, Manufacturer_id=1, Drawer_id=1, idIC_Misc=12, Name="SN74LVC2G132DCUR 2channel NAND Gate"
U9 U10 U11 U12: library part 6, "High Side Driver", Manufacturer_id=1, Drawer_id=1, idIC_Misc=6, Name="BTS716G High Side Driver"
X1: library part 3, "90 Degree", Manufacturer_id=1, MfrPartNo=3-6437285-2, ComponentLink1Description=Datasheet, Drawer_id=1, idConn=3, Link=https://www.te.com/usa-en/product-3-6437285-2.html, Name="AMP Superseal 60POS 90Deg", Num_Contacts=60, Num_Rows=4, Pitch="3 mm"
X2: library part 8, "3 pin header", Manufacturer_id=1, ComponentLink1Description=Datasheet, Drawer_id=1, idConn=8, Link=https://www.digikey.com/products/en/connectors-interconnects/rectangular-connectors-headers-male-pins/314?k=jumper&k=&pkeyword=jumper&pv88=5&sf=0&FV=ffe0013a&quantity=&ColumnSort=0&page=1&pageSize=25, Name=XG8V-0331_3pin_header, Num_Contacts=3, Pitch="2.54 mm"
Y1 Y2 Y3 Y4 Y5: library part 3, Coil_Voltage=12V, Manufacturer_id=1, Drawer_id=1, idRelay=3, LatestRevisionDate=17-Jul-2002, LatestRevisionNote="Re-released for DXP Platform.", Name=ACTP112, PackageReference=MODULE5B, Published=8-Jun-2000, Publisher="Altium Limited"

## Via types
v1: diameter 0.762, hole 0.381, Top Layer to Bottom Layer, 123 vias
v2: diameter 2.34, hole 1, Top Layer to Bottom Layer, 6 vias

## Nets (pads, with @x,y where several pads share a name; then routed paths per layer and width w, separated by ;. In a path a pad name is that pad's centre, name@x,y a point inside that pad or via, vN(x,y) a via of type N, cw(c..) or ccw(c..) an arc to the next point about the centre after c; other vN are vias at no path point)
0.5V: C12.2 R7.1 R8.2 U2.8 U4.8 | length 31.9
  Top Layer w0.254: U4.8@106.484,103.124 105.41,103.124 104.267,104.267 104.267,109.982 105.283,110.998 U2.8@106.484,110.998 109.601,114.115 109.601,116.713 111.111,118.223 R8.2@112.522,118.223 R7.1@112.522,123.585 110.504,123.585 109.22,122.301 C12.2@109.22,121.196
1: MCU.32 R14.2 U8.8 X1.B1 | length 86.5
  Top Layer w0.254: U8.8@116.136,94.361 114.808,94.361 113.284,92.837 113.284,89.916 114.427,88.773 v1(119.761,88.773) ; v1(124.714,92.202) 134.62,102.108 140.446,102.108 141.844,103.506 147.827,103.506 149.225,102.108 149.225,101.092 149.987,100.33 153.67,100.33 154.178,99.822 v1(154.178,96.139) ; MCU.32@144.434,83.379 145.383,84.328 v1(152.019,84.328)
  Bottom Layer w0.254: v1(119.761,88.773) 123.19,92.202 v1(124.714,92.202) ; v1(152.019,84.328) 153.035,84.328 153.529,84.822 R14.2@153.529,86.106 ; v1(154.178,96.139) 154.178,89.295 153.529,88.646 R14.2@153.529,86.106 ; X1.B1@158.243,88.191 156.158,86.106 R14.2@153.529,86.106
2: MCU.31 R17.2 U8.1 X1.B8 | length 96.9
  Top Layer w0.254: v1(108.585,91.567) 108.585,91.444 111.838,88.191 118.057,88.191 118.237,88.011 v1(118.872,88.011) ; v1(108.585,94.361) U8.1@110.686,94.361 ; v1(124.714,90.805) 135.001,101.092 141.18,101.092 142.069,101.981 v1(148.336,101.981) ; MCU.31@144.434,82.879 145.49,82.879 146.253,83.642 155.143,83.642 v1(155.321,83.82)
  Bottom Layer w0.254: v1(108.585,91.567) v1(108.585,94.361) ; v1(118.872,88.011) 120.342,88.011 123.136,90.805 v1(124.714,90.805) ; v1(148.336,101.981) 150.504,99.813 150.504,90.415 150.495,90.406 150.495,84.455 151.765,83.185 154.686,83.185 v1(155.321,83.82) 157.926,83.82 158.764,84.658 R17.2@158.764,85.217 158.764,86.247 160.743,88.226 X1.B8@160.743,89.691
3: MCU.29 R20.2 X1.A34 | length 29.6
  Top Layer w0.254: MCU.29@144.434,81.879 145.711,81.879 146.001,82.169 155.523,82.169 156.285,81.407 v1(158.115,81.407)
  Bottom Layer w0.254: v1(158.115,81.407) 162.56,81.407 166.116,77.851 166.116,77.216 166.864,76.468 R20.2@167.767,76.468 167.767,75.215 X1.A34@166.243,73.691
4: MCU.28 R22.2 X1.A25 | length 25.4
  Top Layer w0.254: MCU.28@144.434,81.379 145.822,81.379 145.977,81.534 154.855,81.534 155.998,80.391 v1(157.48,80.391)
  Bottom Layer w0.254: v1(157.48,80.391) 159.145,80.391 R22.2@163.209,76.327 163.209,74.535 163.743,74.001 X1.A25@163.743,72.191
4.5V: C13.2 R4.1 R9.2 U2.3 U4.3 | length 34.4
  Top Layer w0.254: U4.3@101.034,100.584 98.933,100.584 98.044,101.473 98.044,107.696 98.806,108.458 U2.3@101.034,108.458 102.108,108.458 103.251,109.601 103.251,116.953 R9.2@104.648,118.35 R4.1@104.648,123.585 103.608,123.585 C13.2@101.346,121.323
5: MCU.30 R13.1 U4.1 U4.4 U6.3 X1.A33 | length 179.7
  Top Layer w0.254: v1(99.441,105.156) 99.441,103.632 99.949,103.124 U4.1@101.034,103.124 102.458,103.124 102.997,102.585 102.997,99.695 102.616,99.314 U4.4@101.034,99.314 101.034,97.848 102.235,96.647 U6.3@102.235,95.308 ; v1(129.032,108.839) 132.969,108.839 v1(134.874,110.744) ; MCU.30@144.434,82.379 145.601,82.379 146.026,82.804 156.288,82.804 156.796,82.296 v1(162.814,82.296) 163.83,82.296 164.592,83.058 164.592,84.201 163.414,85.379 156.937,85.379 155.321,86.995 v1(155.321,90.043)
  Bottom Layer w0.254: v1(99.441,105.156) 102.743,105.156 107.442,109.855 107.442,111.125 108.966,112.649 125.222,112.649 v1@128.905,108.966 ; v1(134.874,110.744) 134.874,119.634 140.589,125.349 151.638,125.349 155.321,121.666 v1(155.321,90.043) ; v1(162.814,82.296) 163.449,82.296 166.116,79.629 168.91,79.629 169.418,79.121 169.418,75.311 170.321,74.408 R13.1@170.321,70.691 X1.A33@166.243,70.691 165.989,70.945 165.989,71.599 X1.A33@165.227,70.837